# Allegro board mbseq02.brd
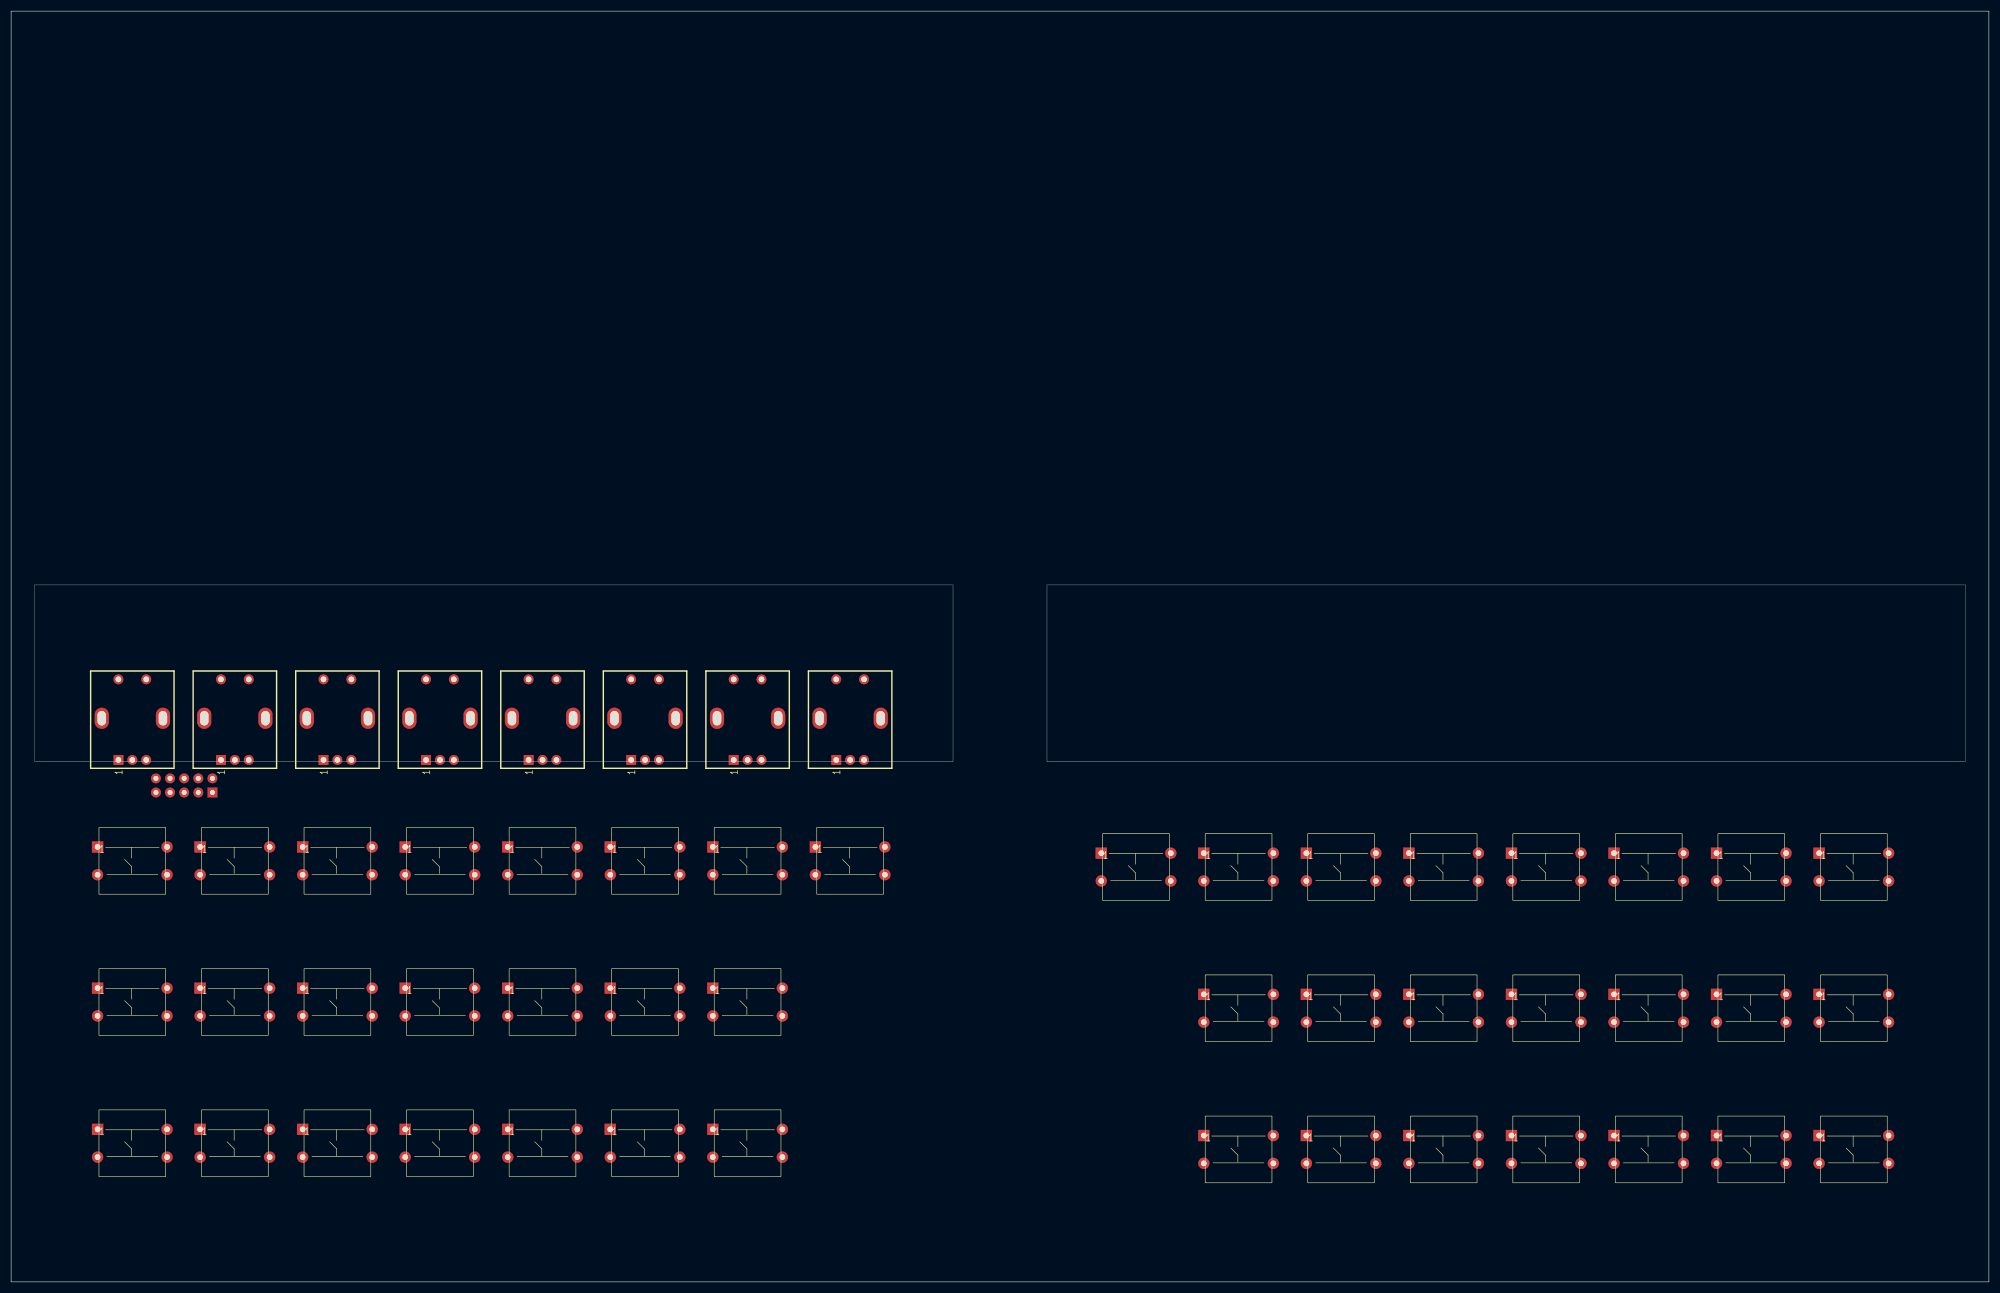
[diagram p0: board, top side]
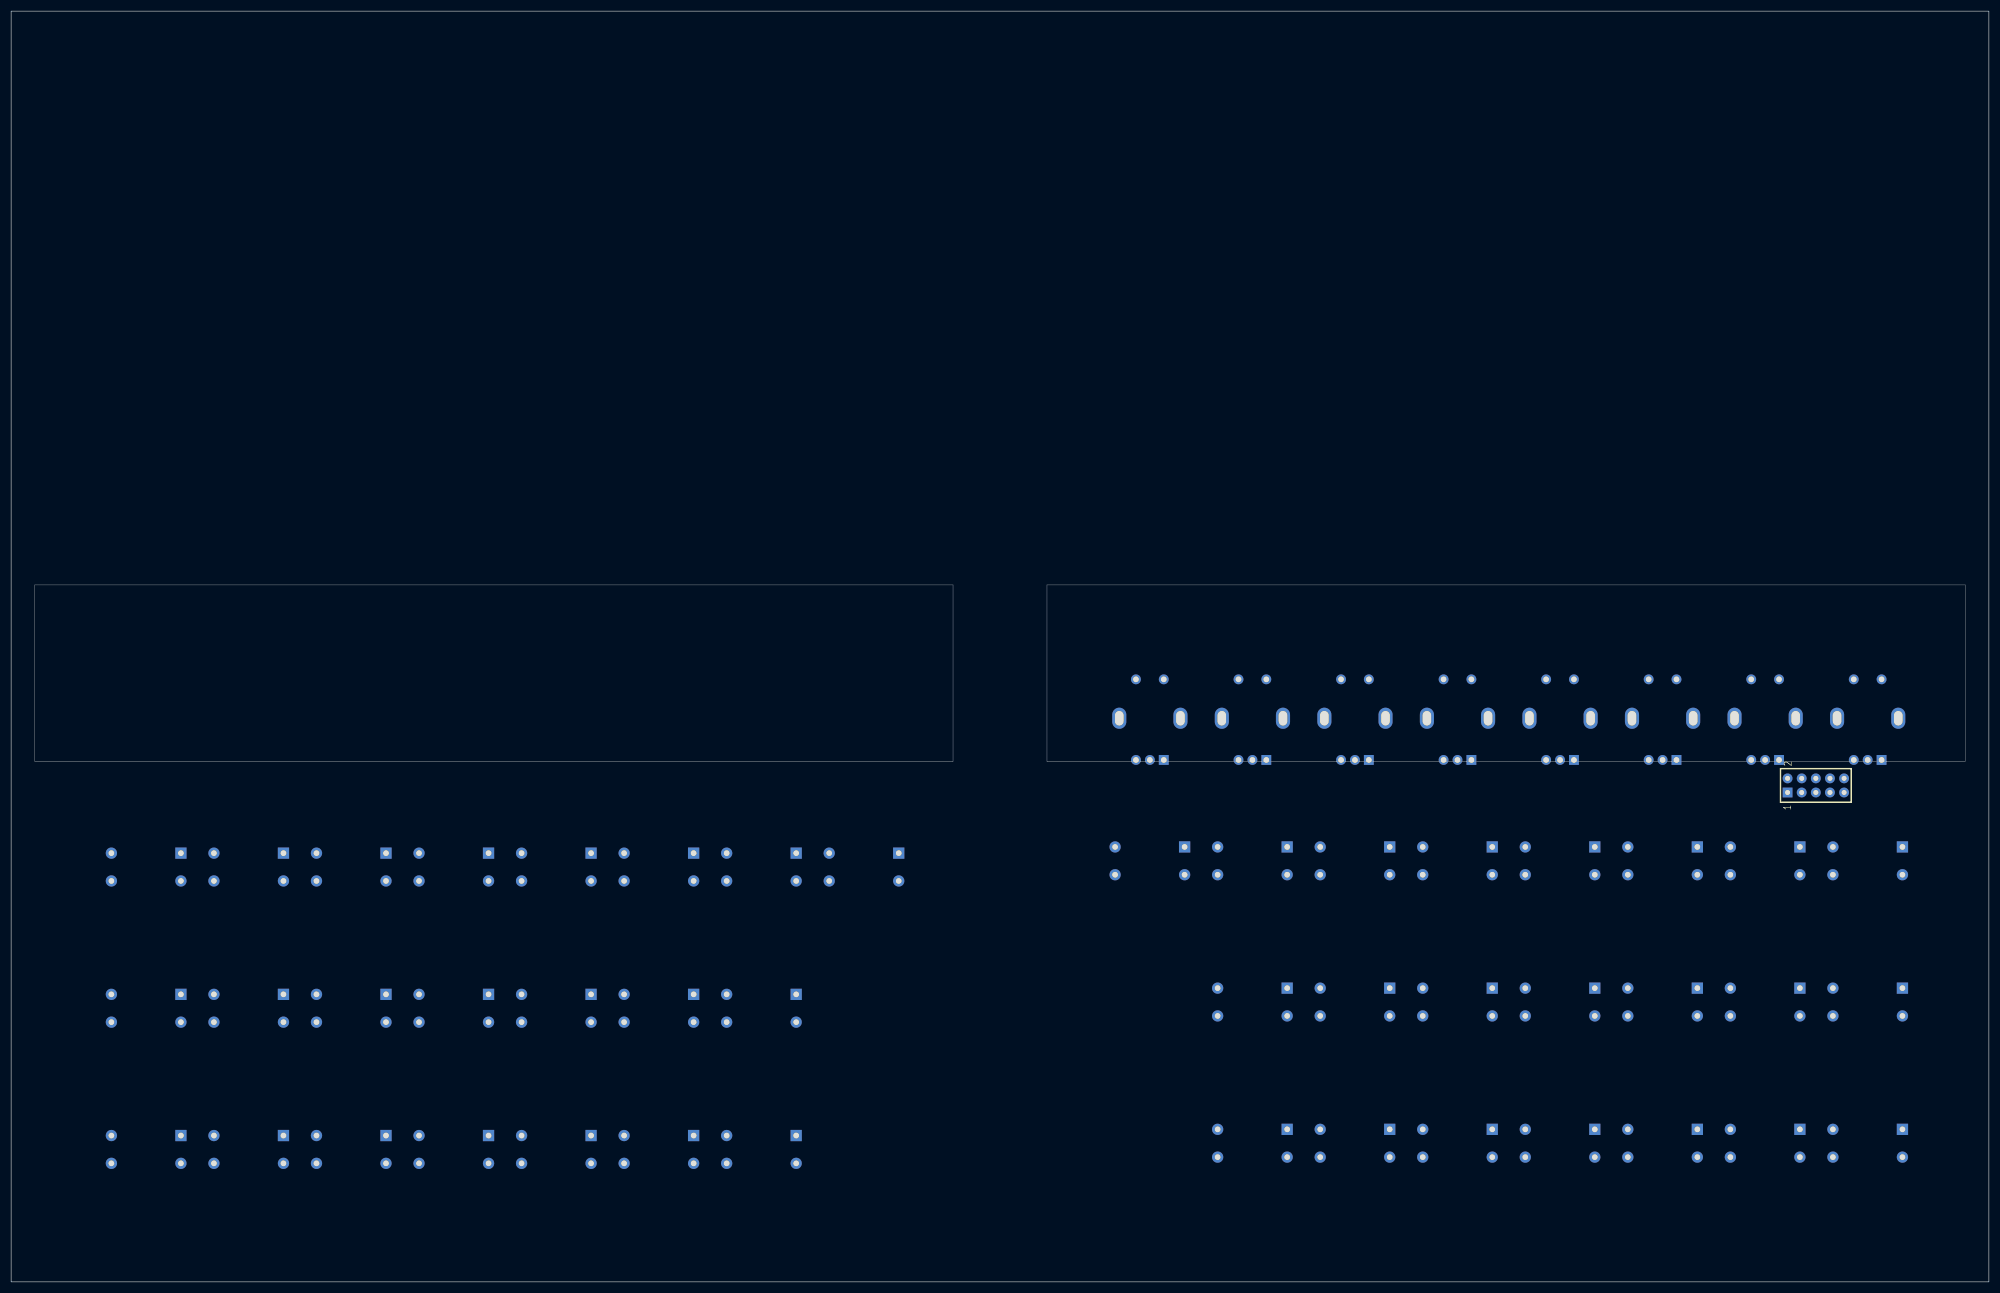
[diagram p1: board, bottom side, seen from below]

Outline 355.6 x 228.6 mm; copper layers: TOP, BOTTOM. Coordinates in mm from the lower left corner of the outline.
Outline path: rectangle 0,0 355.6,228.6 ; 4.25,125.37 169.35,125.37 169.35,93.62 4.25,93.62 4.25,125.37 ; 186.25,125.37 351.35,125.37 351.35,93.62 186.25,93.62 186.25,125.37

## Placement (name value [footprint] x y rotation side)
J1  534206-5  [CONN-AMP-2X5PIN-100MIL-ST]  36.2 88.04 180 bottom
S1  EC11E15244  [SWITCH-EC11E15244]  21.79 101.14 90 top
S2  EC11E15244  [SWITCH-EC11E15244]  40.23 101.14 90 top
S3  EC11E15244  [SWITCH-EC11E15244]  58.67 101.14 90 top
S4  EC11E15244  [SWITCH-EC11E15244]  77.11 101.14 90 top
S5  EC11E15244  [SWITCH-EC11E15244]  95.54 101.14 90 top
S6  EC11E15244  [SWITCH-EC11E15244]  113.98 101.14 90 top
S7  EC11E15244  [SWITCH-EC11E15244]  132.42 101.14 90 top
S8  EC11E15244  [SWITCH-EC11E15244]  150.86 101.14 90 top
S*  -  [unnamed]  257.57 74.63 0 top
S*#2  -  [unnamed]  331.32 23.83 0 top
S*#3  -  [unnamed]  220.7 74.63 0 top
S*#4  -  [unnamed]  276.01 23.83 0 top
S*#5  -  [unnamed]  331.32 49.23 0 top
S*#6  -  [unnamed]  58.67 24.94 0 top
S*#7  -  [unnamed]  21.79 50.34 0 top
S*#8  -  [unnamed]  150.86 75.74 0 top
S*#9  -  [unnamed]  95.54 50.34 0 top
S*#10  -  [unnamed]  113.98 75.74 0 top
S*#11  -  [unnamed]  220.7 23.83 0 top
S*#12  -  [unnamed]  21.79 75.74 0 top
S*#13  -  [unnamed]  113.98 50.34 0 top
S*#14  -  [unnamed]  113.98 24.94 0 top
S*#15  -  [unnamed]  220.7 49.23 0 top
S*#16  -  [unnamed]  294.45 74.63 0 top
S*#17  -  [unnamed]  132.42 75.74 0 top
S*#18  -  [unnamed]  239.13 74.63 0 top
S*#19  -  [unnamed]  312.88 49.23 0 top
S*#20  -  [unnamed]  132.42 24.94 0 top
S*#21  -  [unnamed]  77.11 24.94 0 top
S*#22  -  [unnamed]  239.13 49.23 0 top
S*#23  -  [unnamed]  40.23 75.74 0 top
S*#24  -  [unnamed]  257.57 49.23 0 top
S*#25  -  [unnamed]  294.45 23.83 0 top
S*#26  -  [unnamed]  58.67 75.74 0 top
S*#27  -  [unnamed]  40.23 24.94 0 top
S*#28  -  [unnamed]  257.57 23.83 0 top
S*#29  -  [unnamed]  276.01 74.63 0 top
S*#30  -  [unnamed]  276.01 49.23 0 top
S*#31  -  [unnamed]  95.54 24.94 0 top
S*#32  -  [unnamed]  58.67 50.34 0 top
S*#33  -  [unnamed]  312.88 74.63 0 top
S*#34  -  [unnamed]  132.42 50.34 0 top
S*#35  -  [unnamed]  202.26 74.63 0 top
S*#36  -  [unnamed]  40.23 50.34 0 top
S*#37  -  [unnamed]  21.79 24.94 0 top
S*#38  -  [unnamed]  239.13 23.83 0 top
S*#39  -  [unnamed]  95.54 75.74 0 top
S*#40  -  [unnamed]  312.88 23.83 0 top
S*#41  -  [unnamed]  331.32 74.63 0 top
S*#42  -  [unnamed]  77.11 50.34 0 top
S*#43  -  [unnamed]  77.11 75.74 0 top
S*#44  -  [unnamed]  294.45 49.23 0 top

## Library data of the parts
J1 = J_2X5_ST_AMP_534206: part number: J_2X5_ST_AMP_534206-10016967,534206-5,CONN-AMP-2X5PIN-100MIL-ST
S1-S8 = S_EC11B: part number: S_EC11B-10018475,EC11E15244,SWITCH-EC11E15244

## Footprints (pads in the part's own frame, mm; a bottom-side part is the same pattern mirrored in y, then rotated)
CONN-AMP-2X5PIN-100MIL-ST
  rect 1.778x1.778 hole 0.889: 1(0,0)
  round 1.778 hole 0.889: 2(0,2.54) 3(2.54,0) 4(2.54,2.54) 5(5.08,0) 6(5.08,2.54) 7(7.62,0) 8(7.62,2.54) 9(10.16,0) 10(10.16,2.54)
SWITCH-EC11E15244
  oval 3.81x2.54 hole 2.591x1.524: (0.25,5.5) (0.25,-5.5)
  rect 1.778x1.778 hole 1.016: 1(-7.25,2.5)
  round 1.778 hole 1.016: 2(-7.25,-2.5) 3(-7.25,0) 4(7.25,2.5) 5(7.25,-2.5)
unnamed
  rect 2.032x2.032 hole 1.016: 1(-6.25,2.5)
  round 2.032 hole 1.016: 2(6.25,2.5) 3(-6.25,-2.5) 4(6.25,-2.5)

## Nets
UNNAMED_1_J2X5ST_I10_1: J1.1 S3.2(B)
UNNAMED_1_J2X5ST_I10_2: J1.2 S2.2(B)
UNNAMED_1_J2X5ST_I10_3: J1.3 S3.1(A)
UNNAMED_1_J2X5ST_I10_4: J1.4 S2.1(A)
UNNAMED_1_J2X5ST_I10_5: J1.5 S4.2(B)
UNNAMED_1_J2X5ST_I10_6: J1.6 S1.2(B)
UNNAMED_1_J2X5ST_I10_7: J1.7 S4.1(A)
UNNAMED_1_J2X5ST_I10_8: J1.8 S1.1(A)
UNNAMED_1_J2X5ST_I10_10: J1.9 J1.10 S1.3(C) S2.3(C) S3.3(C) S4.3(C)
UNNAMED_1_J2X5ST_I11_1: S7.2(B)
UNNAMED_1_J2X5ST_I11_2: S6.2(B)
UNNAMED_1_J2X5ST_I11_3: S7.1(A)
UNNAMED_1_J2X5ST_I11_4: S6.1(A)
UNNAMED_1_J2X5ST_I11_5: S8.2(B)
UNNAMED_1_J2X5ST_I11_6: S5.2(B)
UNNAMED_1_J2X5ST_I11_7: S8.1(A)
UNNAMED_1_J2X5ST_I11_8: S5.1(A)
UNNAMED_1_J2X5ST_I11_10: S5.3(C) S6.3(C) S7.3(C) S8.3(C)

Pads without a net: S1 4 5; S2 4 5; S3 4 5; S4 4 5; S5 4 5; S6 4 5; S7 4 5; S8 4 5; S* 1 2 3 4; S*#2 1 2 3 4; S*#3 1 2 3 4; S*#4 1 2 3 4; S*#5 1 2 3 4; S*#6 1 2 3 4; S*#7 1 2 3 4; S*#8 1 2 3 4; S*#9 1 2 3 4; S*#10 1 2 3 4; S*#11 1 2 3 4; S*#12 1 2 3 4; S*#13 1 2 3 4; S*#14 1 2 3 4; S*#15 1 2 3 4; S*#16 1 2 3 4; S*#17 1 2 3 4; S*#18 1 2 3 4; S*#19 1 2 3 4; S*#20 1 2 3 4; S*#21 1 2 3 4; S*#22 1 2 3 4; S*#23 1 2 3 4; S*#24 1 2 3 4; S*#25 1 2 3 4; S*#26 1 2 3 4; S*#27 1 2 3 4; S*#28 1 2 3 4; S*#29 1 2 3 4; S*#30 1 2 3 4; S*#31 1 2 3 4; S*#32 1 2 3 4; S*#33 1 2 3 4; S*#34 1 2 3 4; S*#35 1 2 3 4; S*#36 1 2 3 4; S*#37 1 2 3 4; S*#38 1 2 3 4; S*#39 1 2 3 4; S*#40 1 2 3 4; S*#41 1 2 3 4; S*#42 1 2 3 4; S*#43 1 2 3 4; S*#44 1 2 3 4
